# EAGLE board LCD_Display-euro (EAGLE 6.6.0)
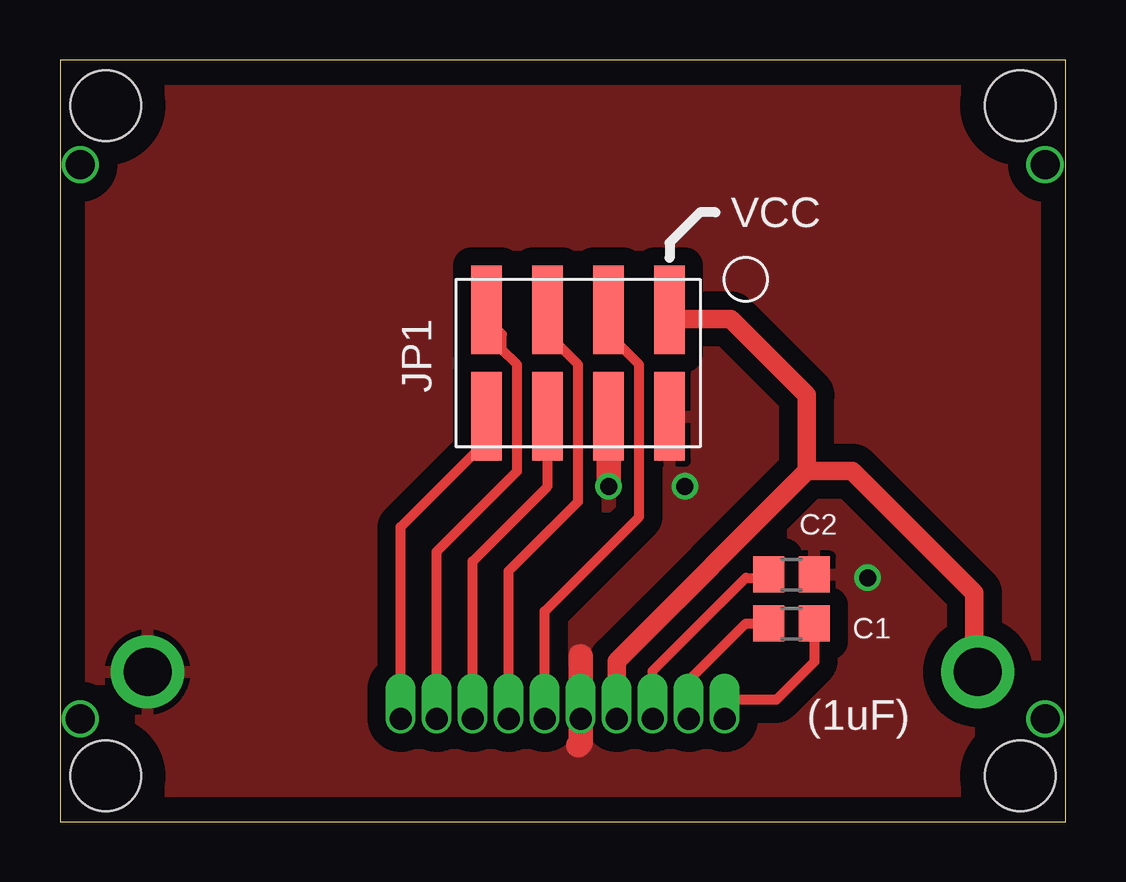
[diagram p0: board, top side]
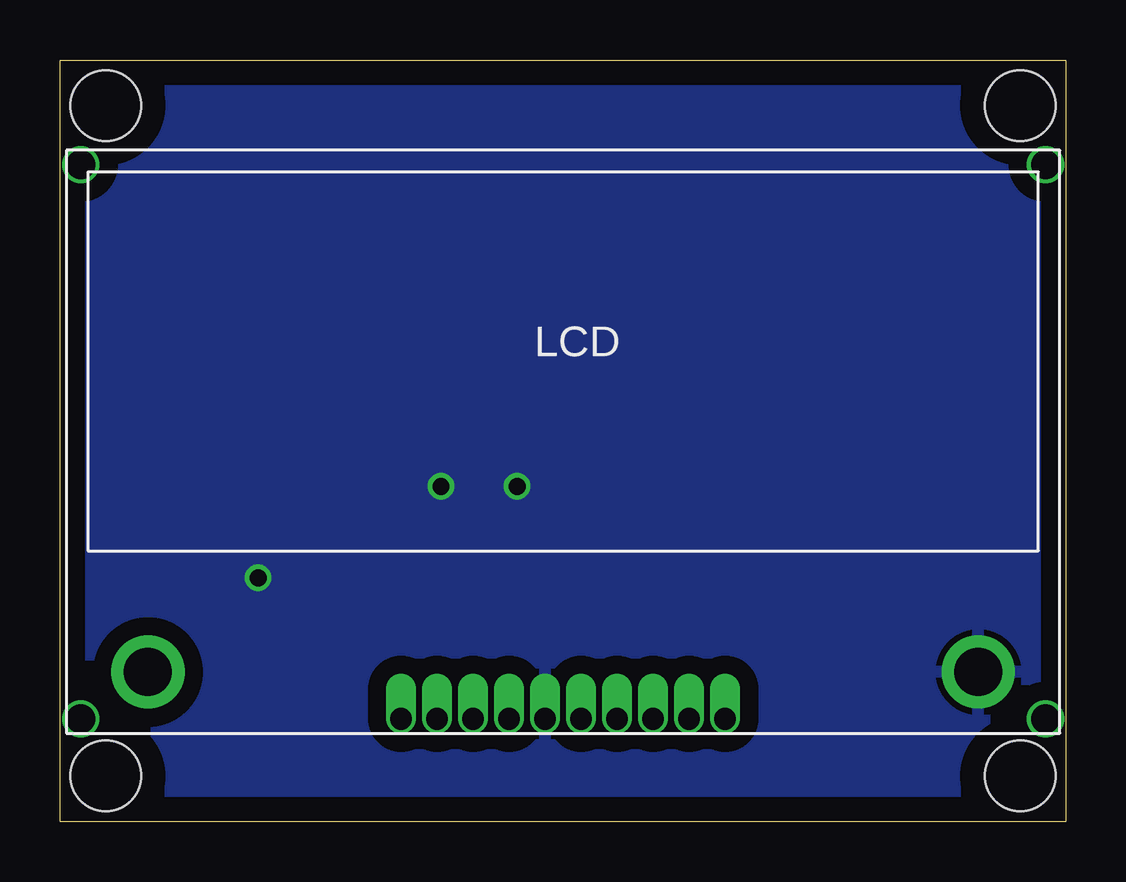
[diagram p1: board, bottom side, seen from below]

Size 41.91 x 31.75 mm. Coordinates in mm from the lower left corner, seen from the top.
Outline: 0,0 41.91,0 41.91,31.75 0,31.75 0,0
Copper layers (1*16): Top 0.035mm / dielectric 1.5mm / Bottom 0.035mm
Design rules "default *": minimum track width 10mil, minimum drill 24mil, track to track 8mil, track to pad 8mil, pad to pad 8mil, via to via 8mil, smd to smd 8mil, copper to edge 40mil, drill to drill 8mil, minimum pad ring 7mil, minimum via ring 8mil, stop-mask expansion 4mil, vias tented up to drill 0mil, thermal gap 10mil
Holes 2.95 mm at 1.91,29.84 1.91,1.91 40.01,29.84 40.01,1.91

## Footprints (pad centres in the part's own frame; a part is rotated, then mirrored left to right if it is on the bottom)
0805 = smd 1.3 x 1.5: 1 -0.95,0; 2 0.95,0
2X4SMT = smd 1.27 x 3.683: 1 -3.81,-2.286; 2 -3.81,2.159; 3 -1.27,-2.286; 4 -1.27,2.159; 5 1.27,-2.286; 6 1.27,2.159; 7 3.81,-2.286; 8 3.81,2.159
NEWHAVEN_LCD = drill 0.9 pad 1.2 offset: 1 27.45,0.6; 2 25.95,0.6; 3 24.45,0.6; 4 22.95,0.6; 5 21.45,0.6; 6 19.95,0.6; 7 18.45,0.6; 8 16.95,0.6; 9 15.45,0.6; 10 13.95,0.6 | drill 2 pad 3.048: A 3.4,2.55; K 38,2.55 | drill 1.2: MOUNT$1 0.6,0.6; MOUNT$2 40.8,0.6; MOUNT$3 40.8,23.7; MOUNT$4 0.6,23.7

## Placement (x,y rotation side)
C1  1uF  [0805]  30.48,8.26 0 top
C2  1uF  [0805]  30.48,10.3 180 top
JP1  [2X4SMT]  21.59,19.05 180 top
U1  NEWHAVEN_LCD  [NEWHAVEN_LCD]  41.65,3.68 0 bottom

## Library data of the parts
C1 C2 = rlc-jqi; PARTNO: 1276-2396-1-ND
JP1 = mcu-accessories
U1 = mcu-accessories; PARTNUM: NHD-C0216CZ-FSW-FBW-3V3-ND

## Nets
CSB: JP1.6 U1.3
GND: C2.1 JP1.2 JP1.4 U1.6 U1.K
N$1: C1.1 U1.9
N$2: C1.2 U1.10
N$3: C2.2 U1.8
RS: JP1.7 U1.2
RST: JP1.8 U1.1
SCL: JP1.5 U1.4
SI: JP1.3 U1.5
VDD: JP1.1 U1.7 U1.A

## Tracks (layer width: path | path; a pad name or v marks a point on that pad's centre or on a via)
CSB
  Top 0.406: U1.3 17.2,10.85 20.32,13.97 JP1.6
GND  (via drill 0.7)
  Top 0.762: 21.7,6.88 21.59,6.99
  Top 1.016: v22.86,13.97 22.86,15.88 | 21.7,6.88 U1.6 21.7,3.28 21.59,3.17
  other vias: 26.04,13.97 33.66,10.16
  pour Top (isolate 0.762): 0,0 41.91,0 41.91,31.75 0,31.75
  pour Bottom (isolate 0.762): 0,31.75 41.91,31.75 41.91,0 0,0
N$1
  Top 0.406: U1.9 26.2,5.88 28.57,8.26 C1.1 29.84,8.26
N$2
  Top 0.406: C1.2 31.43,6.67 29.84,5.08 27.94,5.08 27.7,4.84 U1.10
N$3
  Top 0.406: U1.8 24.7,6.28 28.57,10.16 29.39,10.16 C2.2
RS
  Top 0.406: U1.2 15.7,11.25 19.05,14.61 19.05,19.05 18.41,19.68 18.41,20.32 17.78,20.95 JP1.7
RST
  Top 0.406: U1.1 14.2,12.29 17.78,15.88 JP1.8
SCL
  Top 0.406: U1.4 18.7,10.44 21.59,13.34 21.59,19.05 20.32,20.32 JP1.5
SI
  Top 0.406: U1.5 20.2,8.77 24.13,12.7 24.13,19.05 22.86,20.32 JP1.3
VDD
  Top 0.762: U1.7 23.2,6.69 31.11,14.61 | 31.11,14.61 31.11,17.78 27.94,20.95 25.78,20.95 JP1.1 | 31.11,14.61 33.02,14.61 38.1,9.53 38.1,6.38 U1.A

## Text on the board
tPlace: VCC | (1uF)
Document: Sized for 12HP Eurocard unit